# EAGLE board TRIAC-driver (EAGLE 5.11)
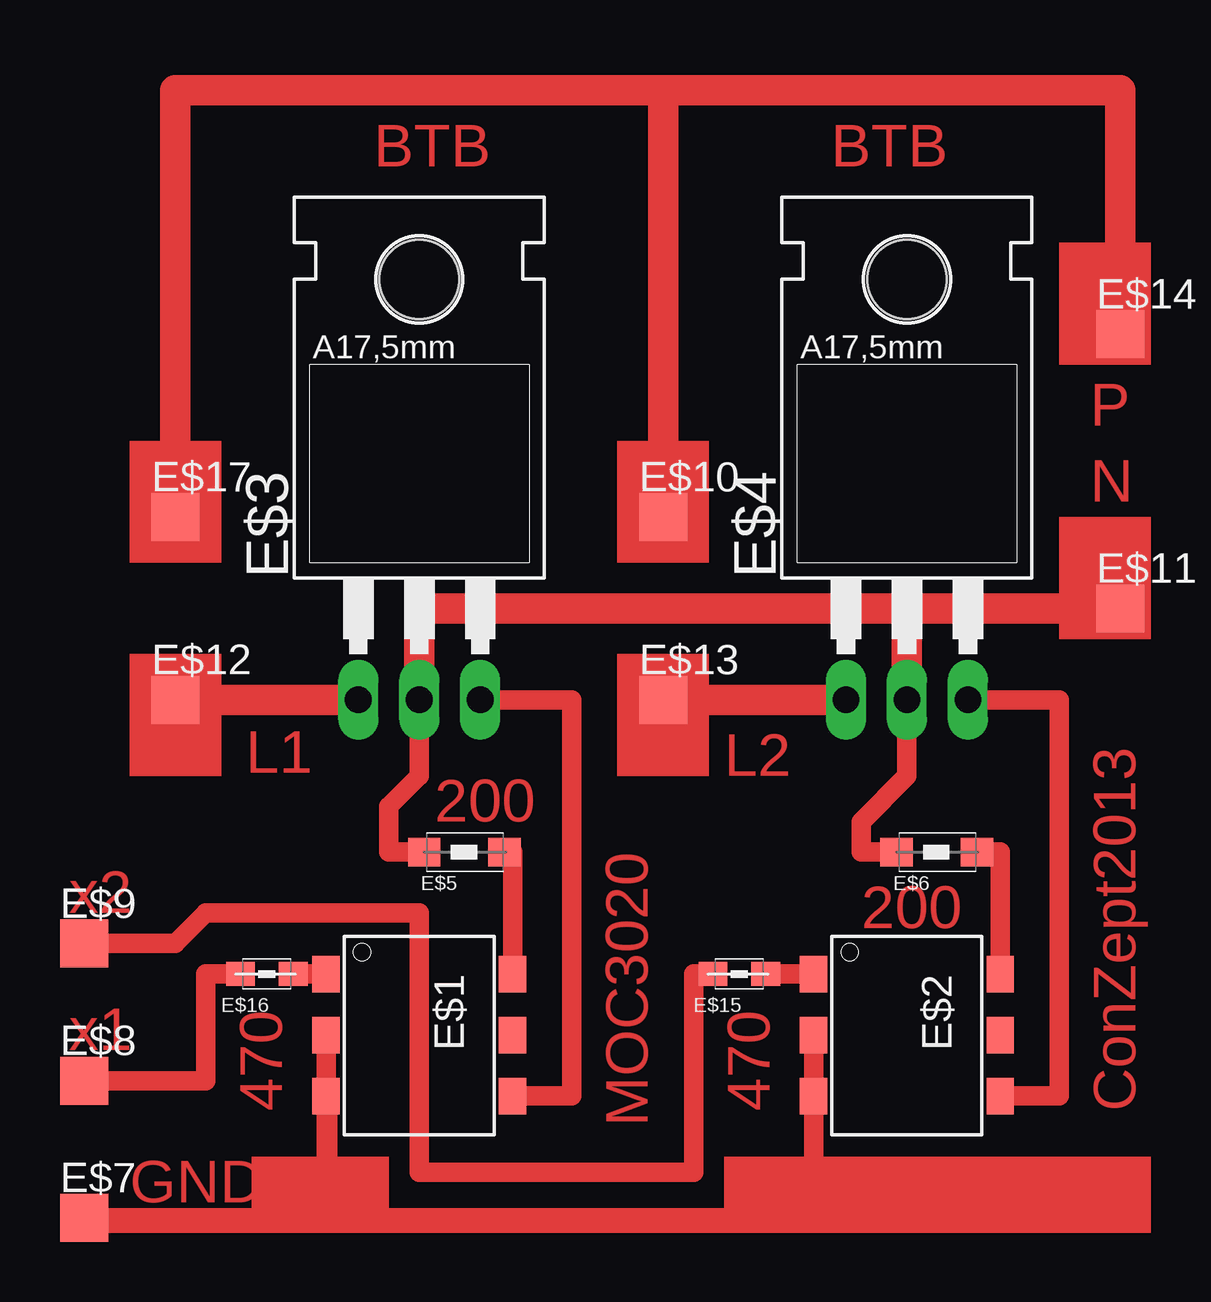
[diagram p0: board, top side]

No outline drawn. Coordinates in mm, seen from the top.
Copper layers (1*16): Top 0.035mm / dielectric 1.5mm / Bottom 0.035mm
Design rules "default": minimum track width 10mil, minimum drill 24mil, track to track 8mil, track to pad 8mil, pad to pad 8mil, via to via 8mil, smd to smd 8mil, copper to edge 40mil, drill to drill 8mil, minimum pad ring 10mil, minimum via ring 8mil, stop-mask expansion 4mil, vias tented up to drill 0mil, thermal gap 10mil

## Footprints (pad centres in the part's own frame; a part is rotated, then mirrored left to right if it is on the bottom)
DIP6/LOW = smd 1.524 x 1.143: 1 -2.54,-3.886; 2 0,-3.886; 3 2.54,-3.886; 4 2.54,3.886; 5 0,3.886; 6 -2.54,3.886
TO220AB = drill 1.118 long: 1 -2.54,-6.35; 2 0,-6.35; 3 2.54,-6.35 | hole 3.302: 0,11.176
1206 = smd 1.35 x 1.2: 1 -1.7,0; 2 1.65,0
TP20SQ = smd 2 x 2: TP 0,0
0805 = smd 1.2 x 1: 1 -1.1,0; 2 1.1,0

## Placement (x,y rotation side)
E$1  [DIP6/LOW]  17.78,10.16 270 top
E$2  [DIP6/LOW]  38.1,10.16 270 top
E$3  [TO220AB]  17.78,30.48 0 top
E$4  [TO220AB]  38.1,30.48 0 top
E$5  [1206]  19.68,17.78 0 top
E$6  [1206]  39.37,17.78 0 top
E$7  [TP20SQ]  3.81,2.54 0 top
E$8  [TP20SQ]  3.81,8.26 0 top
E$9  [TP20SQ]  3.81,13.97 0 top
E$10  [TP20SQ]  27.94,31.75 0 top
E$11  [TP20SQ]  46.99,27.94 0 top
E$12  [TP20SQ]  7.62,24.13 0 top
E$13  [TP20SQ]  27.94,24.13 0 top
E$14  [TP20SQ]  46.99,39.37 0 top
E$15  [0805]  31.11,12.7 0 top
E$16  [0805]  11.43,12.7 0 top
E$17  [TP20SQ]  7.62,31.75 0 top

## Library data of the parts
E$1 E$2 = smd-special
E$3 E$4 = triac
E$5 E$6 E$15 E$16 = wuerth-elektronik
E$7-E$14 E$17 = testpad

## Nets
S$1: E$1.2 E$1.3 E$2.2 E$2.3 E$7.TP
S$2: E$1.1 E$16.2
S$3: E$2.1 E$15.2
S$4: E$9.TP E$15.1
S$5: E$8.TP E$16.1
S$6: E$1.4 E$3.3
S$7: E$2.4 E$4.3
S$8: E$1.6 E$5.2
S$9: E$2.6 E$6.2
S$10: E$3.1 E$12.TP
S$11: E$4.1 E$13.TP
S$12: E$3.2 E$4.2 E$5.1 E$6.1 E$11.TP
S$13: E$10.TP E$14.TP E$17.TP

## Tracks (layer width: path | path; a pad name or v marks a point on that pad's centre or on a via)
S$1
  Top 0.813: E$7.TP 13.89,2.54 E$1.3 | E$1.3 13.97,7.62 13.97,2.54 34.21,2.54 E$2.3 E$2.2 | E$1.3 E$1.2
S$2
  Top 0.813: E$16.2 E$1.1
S$3
  Top 0.813: E$2.1 E$15.2
S$4
  Top 0.813: E$9.TP 7.62,13.97 8.89,15.24 17.78,15.24 17.78,4.45 29.21,4.45 29.21,12.7 E$15.1
S$5
  Top 0.813: E$16.1 8.89,12.7 8.89,8.26 E$8.TP
S$6
  Top 0.813: E$1.4 24.13,7.62 24.13,24.13 E$3.3
S$7
  Top 0.813: E$4.3 44.45,24.13 44.45,7.62 E$2.4
S$8
  Top 0.813: E$5.2 21.67,17.78 E$1.6
S$9
  Top 0.813: E$6.2 41.99,17.78 E$2.6
S$10
  Top 1.27: E$12.TP E$3.1
S$11
  Top 1.27: E$13.TP E$4.1
S$12
  Top 0.813: E$6.1 36.2,17.78 36.2,19.05 38.1,20.95 E$4.2 | E$5.1 16.51,17.78 16.51,19.68 17.78,20.95 E$3.2
  Top 1.27: E$3.2 17.78,27.94 38.1,27.94 | 38.1,27.94 E$4.2 | 38.1,27.94 E$11.TP
S$13
  Top 1.27: E$17.TP 7.62,49.53 27.94,49.53 | E$10.TP 27.94,49.53 | 27.94,49.53 46.99,49.53 E$14.TP
(copper drawn outside any net)
  shapes: Top area x10

## Text on the board
Top: BTB | BTB | P | N | L1 | L2 | 200 | x2 | 200 | x1 | 470 | 470 | ConZept2013 | MOC3020 | GND